# EAGLE board VCF-LM324-Stereo-Modular+LFO (EAGLE 7.7.0)
Voltage-Controlled Low-Pass Filter with LFO using LM324 Quad-Opamp (Stereo) Using CadSoft EAGLE Modular Design Sheets
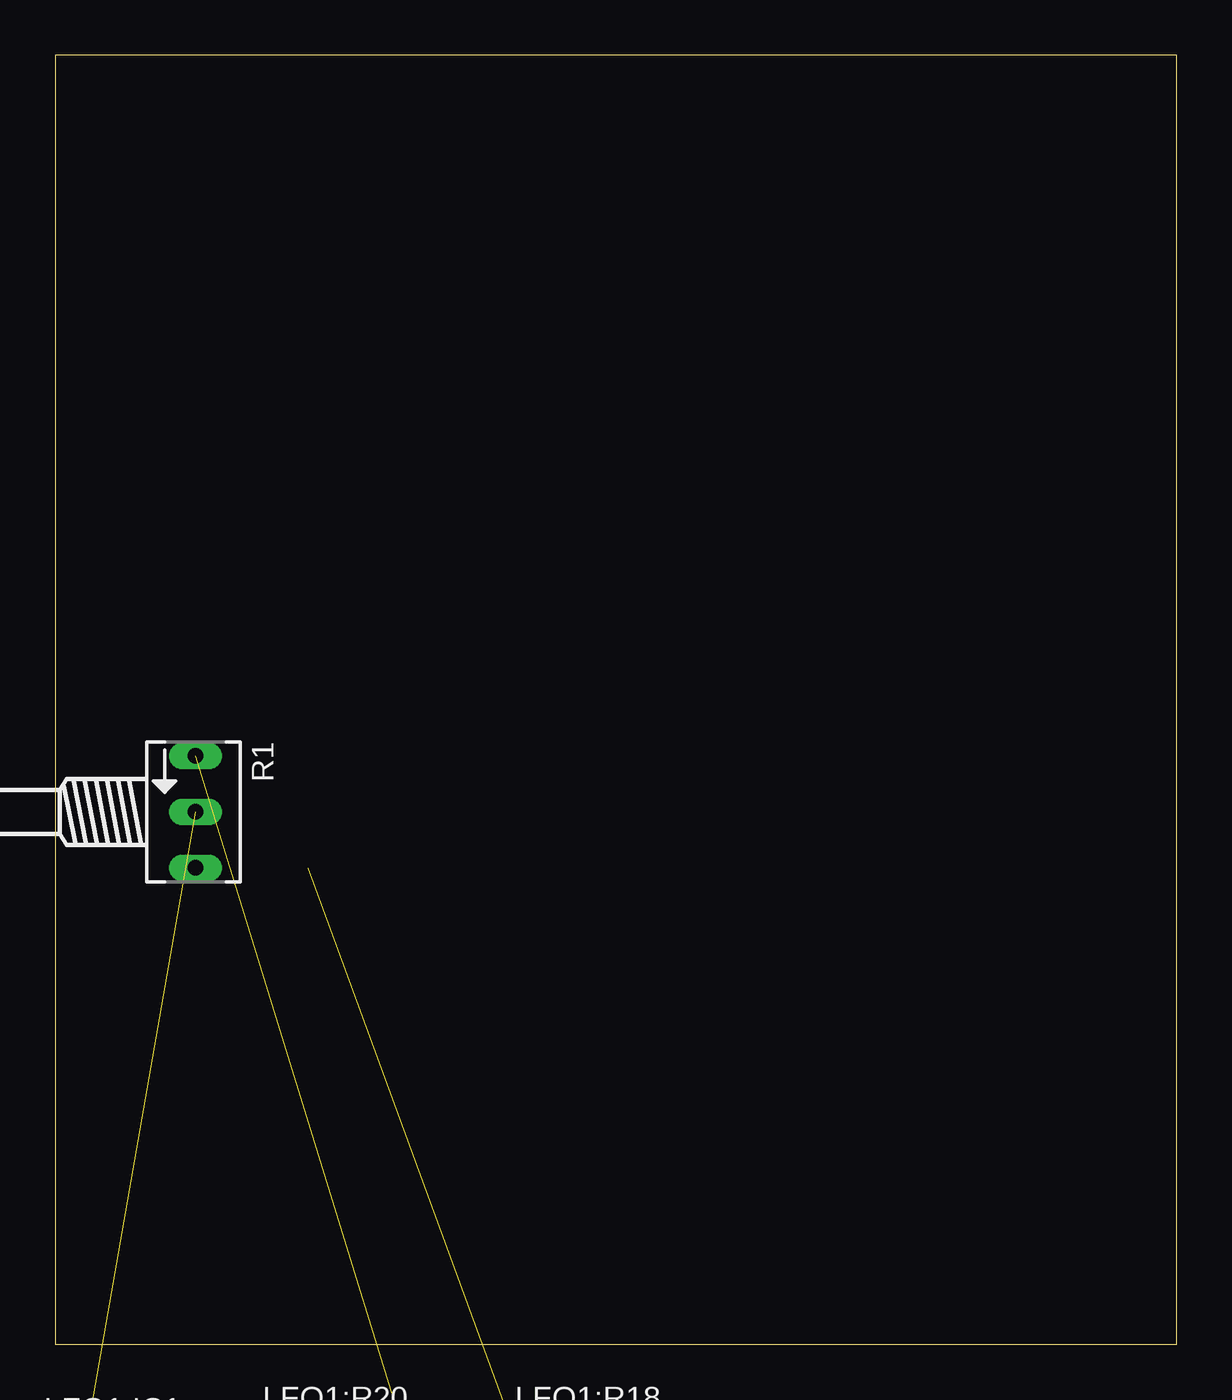
[diagram p0: board, top side]
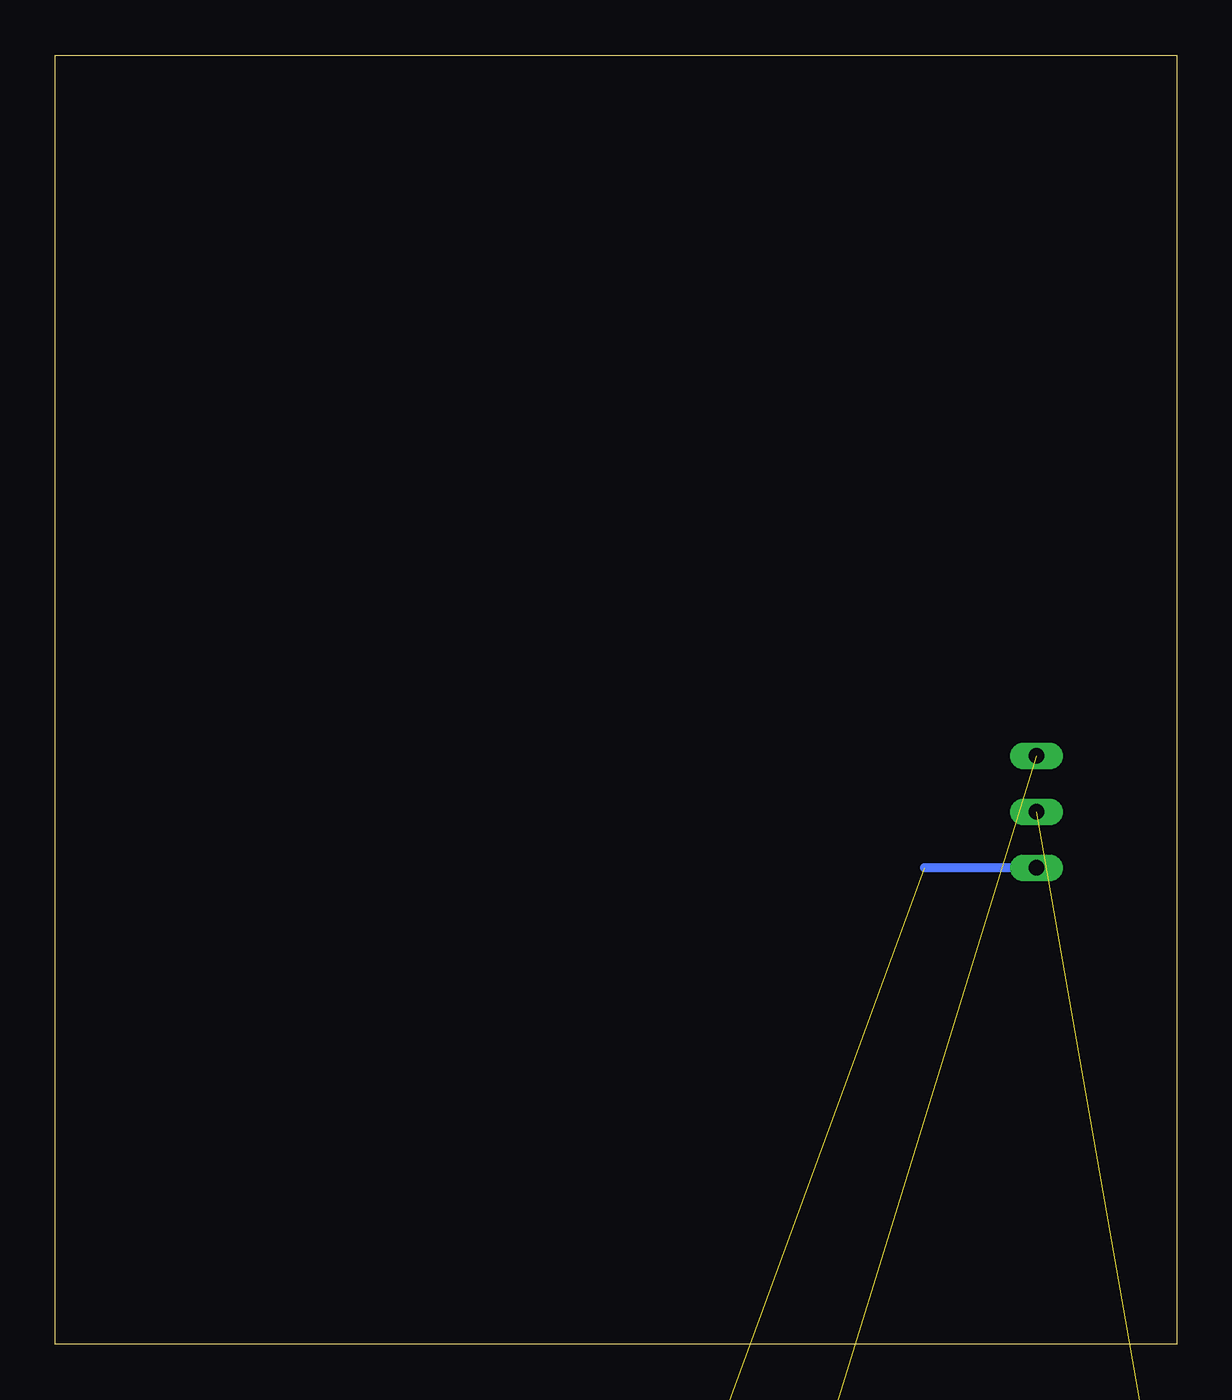
[diagram p1: board, bottom side, seen from below]

Size 50.8 x 58.42 mm. Coordinates in mm from the lower left corner, seen from the top.
Outline: 0,0 50.8,0 50.8,58.42 0,58.42 0,0
Copper layers (1*16): Top 0.035mm / dielectric 1.5mm / Bottom 0.035mm
Design rules "default": minimum track width 10mil, minimum drill 24mil, track to track 8mil, track to pad 8mil, pad to pad 8mil, via to via 8mil, smd to smd 8mil, copper to edge 40mil, drill to drill 8mil, minimum pad ring 10mil, minimum via ring 8mil, stop-mask expansion 4mil, vias tented up to drill 0mil, thermal gap 10mil

## Footprints (pad centres in the part's own frame; a part is rotated, then mirrored left to right if it is on the bottom)
C050-020X036 = drill 0.8: 1 -2.54,0; 2 2.54,0
C050-024X044/V = drill 0.8: 1 0,2.54; 2 0,-2.54
DO34-7V = drill 0.8: A 0,3.81; C 0,-3.81
DIL14 = drill 0.8 long: 1 -3.81,7.62; 2 -3.81,5.08; 3 -3.81,2.54; 4 -3.81,0; 5 -3.81,-2.54; 6 -3.81,-5.08; 7 -3.81,-7.62; 8 3.81,-7.62; 9 3.81,-5.08; 10 3.81,-2.54; 11 3.81,0; 12 3.81,2.54; 13 3.81,5.08; 14 3.81,7.62
LED3MM = drill 0.813 octagon: A -1.27,0; K 1.27,0
0202/7-V = drill 0.7: 1 0,-3.81; 2 0,3.81
0202/7 = drill 0.7: 1 0,3.81; 2 0,-3.81
POT = drill 1 pad 1.93: 1 -2.54,0; 2 0,0; 3 2.54,0
SPAD = drill 1 pad 1.93: 1 0,0
B64Y = drill 0.7 long: A 2.54,0; E -2.54,0; S 0,0
POT-STEREO = drill 1: 1-1 -2.46,-2.54; 1-2 0,-2.54; 1-3 2.46,-2.54; 2-1 -2.46,-0.08; 2-2 0,-0.08; 2-3 2.46,-0.08
C050-024X044 = drill 0.8: 1 -2.54,0; 2 2.54,0
E2,5-3 = drill 0.7 square: + 0,1.27 | drill 0.7: - 0,-1.27
DO34-10V = drill 0.8: A 0,5.08; C 0,-5.08

## Placement (x,y rotation side)
C1  100nF  [C050-020X036]  -26.67,-153.67 0 top  (outside the outline)
LFO1:C9  1uF  [C050-024X044/V]  31.75,-35.56 0 top  (outside the outline)
LFO1:D3  1N4148  [DO34-7V]  6.35,-36.83 0 top  (outside the outline)
LFO1:D4  1N4148  [DO34-7V]  13.97,-36.83 0 top  (outside the outline)
LFO1:IC1  LM324  [DIL14]  2.54,-12.7 0 top  (outside the outline)
LFO1:LED1  [LED3MM]  2.54,-44.45 0 top  (outside the outline)
LFO1:LED2  [LED3MM]  16.51,-44.45 0 top  (outside the outline)
LFO1:R16  47k  [0202/7-V]  3.81,-26.67 0 top  (outside the outline)
LFO1:R17  4.7k  [0202/7]  22.86,-36.83 0 top  (outside the outline)
LFO1:R18  10k  [POT]  25.4,-5.08 0 top  (outside the outline)
LFO1:R19  4.7k  [0202/7-V]  12.7,-26.67 0 top  (outside the outline)
LFO1:R20  100k  [POT]  13.97,-5.08 0 top  (outside the outline)
LFO1:R21  100k  [0202/7-V]  21.59,-26.67 0 top  (outside the outline)
LFO1:R22  100k  [0202/7-V]  30.48,-26.67 0 top  (outside the outline)
LFO1:R23  1k  [0202/7-V]  3.81,-36.83 0 top  (outside the outline)
LFO1:TRI_OUT  TRIANGLE  [SPAD]  -1.27,-45.72 0 top  (outside the outline)
R1  100k  [B64Y]  6.35,24.13 270 top
R2  10k  [POT-STEREO]  -40.64,-186.69 0 top  (outside the outline)
VCF_LEFT:C1  100nF  [C050-024X044]  10.16,-82.55 0 top  (outside the outline)
VCF_LEFT:C2  100nF  [C050-024X044]  -10.16,-90.17 0 top  (outside the outline)
VCF_LEFT:C3  1uF  [E2,5-3]  -10.16,-82.55 0 top  (outside the outline)
VCF_LEFT:C4  1uF  [E2,5-3]  -3.81,-82.55 0 top  (outside the outline)
VCF_LEFT:C5  100nF  [C050-024X044]  -27.94,-281.94 0 top  (outside the outline)
VCF_LEFT:C6  100nF  [C050-024X044]  -20.32,-281.94 0 top  (outside the outline)
VCF_LEFT:C7  1uF  [E2,5-3]  -22.86,-271.78 0 top  (outside the outline)
VCF_LEFT:C8  1uF  [E2,5-3]  -16.51,-271.78 0 top  (outside the outline)
VCF_LEFT:D1  1N4148  [DO34-10V]  11.43,-55.88 0 top  (outside the outline)
VCF_LEFT:D2  1N4148  [DO34-7V]  -19.05,-242.57 0 top  (outside the outline)
VCF_LEFT:IC1  LM324  [DIL14]  -7.62,-59.69 0 top  (outside the outline)
VCF_LEFT:IC2  LM324  [DIL14]  -39.37,-248.92 0 top  (outside the outline)
VCF_LEFT:R2  1k  [0202/7]  -11.43,-73.66 0 top  (outside the outline)
VCF_LEFT:R3  1k  [0202/7]  -7.62,-73.66 0 top  (outside the outline)
VCF_LEFT:R4  470k  [0202/7]  -3.81,-73.66 0 top  (outside the outline)
VCF_LEFT:R5  100k  [0202/7]  0,-73.66 0 top  (outside the outline)
VCF_LEFT:R6  100k  [0202/7]  3.81,-73.66 0 top  (outside the outline)
VCF_LEFT:R7  100k  [0202/7]  7.62,-73.66 0 top  (outside the outline)
VCF_LEFT:R9  1k  [0202/7]  -34.29,-262.89 0 top  (outside the outline)
VCF_LEFT:R10  1k  [0202/7]  -30.48,-262.89 0 top  (outside the outline)
VCF_LEFT:R11  470k  [0202/7]  -26.67,-262.89 0 top  (outside the outline)
VCF_LEFT:R12  100k  [0202/7]  -22.86,-262.89 0 top  (outside the outline)
VCF_LEFT:R13  100k  [0202/7]  -19.05,-262.89 0 top  (outside the outline)
VCF_LEFT:R14  100k  [0202/7]  -15.24,-262.89 0 top  (outside the outline)
VCF_RIGHT:C1  100nF  [C050-024X044]  -34.29,-233.68 0 top  (outside the outline)
VCF_RIGHT:C2  100nF  [C050-024X044]  -26.67,-233.68 0 top  (outside the outline)
VCF_RIGHT:C3  1uF  [E2,5-3]  -22.86,-223.52 0 top  (outside the outline)
VCF_RIGHT:C4  1uF  [E2,5-3]  -41.91,-233.68 0 top  (outside the outline)
VCF_RIGHT:C5  100nF  [C050-024X044]  -12.7,-281.94 0 top  (outside the outline)
VCF_RIGHT:C6  100nF  [C050-024X044]  -41.91,-288.29 0 top  (outside the outline)
VCF_RIGHT:C7  1uF  [E2,5-3]  -41.91,-281.94 0 top  (outside the outline)
VCF_RIGHT:C8  1uF  [E2,5-3]  -35.56,-281.94 0 top  (outside the outline)
VCF_RIGHT:D1  1N4148  [DO34-10V]  -31.75,-205.74 0 top  (outside the outline)
VCF_RIGHT:D2  1N4148  [DO34-7V]  -44.45,-262.89 0 top  (outside the outline)
VCF_RIGHT:IC1  LM324  [DIL14]  -39.37,-210.82 0 top  (outside the outline)
VCF_RIGHT:IC2  LM324  [DIL14]  -26.67,-248.92 0 top  (outside the outline)
VCF_RIGHT:R2  1k  [0202/7]  -21.59,-204.47 0 top  (outside the outline)
VCF_RIGHT:R3  1k  [0202/7]  -43.18,-224.79 0 top  (outside the outline)
VCF_RIGHT:R4  470k  [0202/7]  -39.37,-224.79 0 top  (outside the outline)
VCF_RIGHT:R5  100k  [0202/7]  -35.56,-224.79 0 top  (outside the outline)
VCF_RIGHT:R6  100k  [0202/7]  -31.75,-224.79 0 top  (outside the outline)
VCF_RIGHT:R7  100k  [0202/7]  -27.94,-224.79 0 top  (outside the outline)
VCF_RIGHT:R9  1k  [0202/7]  -11.43,-262.89 0 top  (outside the outline)
VCF_RIGHT:R10  1k  [0202/7]  -43.18,-273.05 0 top  (outside the outline)
VCF_RIGHT:R11  470k  [0202/7]  -39.37,-273.05 0 top  (outside the outline)
VCF_RIGHT:R12  100k  [0202/7]  -35.56,-273.05 0 top  (outside the outline)
VCF_RIGHT:R13  100k  [0202/7]  -31.75,-273.05 0 top  (outside the outline)
VCF_RIGHT:R14  100k  [0202/7]  -27.94,-273.05 0 top  (outside the outline)

## Library data of the parts
C1 LFO1:C9 VCF_LEFT:C1-VCF_LEFT:C8 VCF_RIGHT:C1-VCF_RIGHT:C8 = c
LFO1:D3 LFO1:D4 VCF_LEFT:D1 VCF_LEFT:D2 VCF_RIGHT:D1 VCF_RIGHT:D2 = d
LFO1:IC1 VCF_LEFT:IC1 VCF_LEFT:IC2 VCF_RIGHT:IC1 VCF_RIGHT:IC2 = ic
LFO1:LED1 LFO1:LED2 = led
LFO1:R16-LFO1:R23 R1 R2 VCF_LEFT:R2-VCF_LEFT:R7 VCF_LEFT:R9-VCF_LEFT:R14 VCF_RIGHT:R2-VCF_RIGHT:R7 VCF_RIGHT:R9-VCF_RIGHT:R14 = r
LFO1:TRI_OUT = pad

## Nets
CV_POT: R1.S VCF_LEFT:R2.2 VCF_RIGHT:R2.2
GND: C1.2 LFO1:R22.1 R1.A VCF_LEFT:D1.C VCF_LEFT:D2.C VCF_LEFT:IC1.11 VCF_LEFT:R6.1 VCF_LEFT:R13.1 VCF_RIGHT:D1.C VCF_RIGHT:D2.C VCF_RIGHT:IC1.11 VCF_RIGHT:R6.1 VCF_RIGHT:R13.1
LFO1:N$14: LFO1:IC1.7 LFO1:R16.2 LFO1:R19.1
LFO1:N$15: LFO1:IC1.5 LFO1:LED1.A LFO1:LED2.K LFO1:R16.1
LFO1:N$26: LFO1:C9.1 LFO1:D3.C LFO1:D4.A LFO1:IC1.9
LFO1:N$28: LFO1:C9.2 LFO1:IC1.8 LFO1:LED1.K LFO1:LED2.A LFO1:R23.2
LFO1:OA_C_IN+: LFO1:IC1.6 LFO1:IC1.10 LFO1:R21.1 LFO1:R22.2
LFO1:TRIM_1_A: LFO1:D3.A LFO1:R20.1
LFO1:TRIM_1_B: LFO1:D4.C LFO1:R20.3
LFO1:TRIM_2_A: LFO1:R17.1 LFO1:R18.3
LFO1:TRIM_2_B: LFO1:R18.1 LFO1:R19.2
LFO1:TRIM_P: LFO1:R17.2 LFO1:R18.2 LFO1:R20.2
LFO1:V+: LFO1:IC1.4
LFO1:V-: LFO1:IC1.11
N$1: R2.1-2 R2.1-3 VCF_LEFT:C3.+ VCF_LEFT:IC1.1 VCF_LEFT:R7.2
N$2: R2.1-1 VCF_LEFT:C2.2
N$3: R2.2-2 R2.2-3 VCF_RIGHT:C3.+ VCF_RIGHT:IC1.1 VCF_RIGHT:R7.2
N$4: R2.2-1 VCF_RIGHT:C2.2
N$5: LFO1:R23.1 LFO1:TRI_OUT.1 VCF_LEFT:R3.2 VCF_RIGHT:R3.2
VCC: C1.1 LFO1:R21.2 R1.E VCF_LEFT:IC1.4 VCF_LEFT:R5.1 VCF_LEFT:R12.1 VCF_RIGHT:IC1.4 VCF_RIGHT:R5.1 VCF_RIGHT:R12.1
VCF_LEFT:CV_IN1: VCF_LEFT:R10.2
VCF_LEFT:CV_POT1: VCF_LEFT:R9.2
VCF_LEFT:L_IN: VCF_LEFT:C4.+
VCF_LEFT:L_OUT: VCF_LEFT:C3.-
VCF_LEFT:N$2: VCF_LEFT:C1.1 VCF_LEFT:IC1.2 VCF_LEFT:R4.2 VCF_LEFT:R7.1
VCF_LEFT:N$7: VCF_LEFT:IC1.3 VCF_LEFT:R5.2 VCF_LEFT:R6.2
VCF_LEFT:N$9: VCF_LEFT:C1.2 VCF_LEFT:C2.1 VCF_LEFT:D1.A VCF_LEFT:R2.1 VCF_LEFT:R3.1
VCF_LEFT:N$10: VCF_LEFT:C4.- VCF_LEFT:R4.1
VCF_LEFT:N$13: VCF_LEFT:IC2.13 VCF_LEFT:R12.2 VCF_LEFT:R13.2
VCF_LEFT:N$16: VCF_LEFT:C5.2 VCF_LEFT:C6.1 VCF_LEFT:D2.A VCF_LEFT:R9.1 VCF_LEFT:R10.1
VCF_LEFT:N$17: VCF_LEFT:C5.1 VCF_LEFT:IC2.12 VCF_LEFT:R11.2 VCF_LEFT:R14.1
VCF_LEFT:N$20: VCF_LEFT:C8.- VCF_LEFT:R11.1
VCF_LEFT:R_IN: VCF_LEFT:C8.+
VCF_LEFT:R_OUT: VCF_LEFT:C7.-
VCF_LEFT:R_P_R_IN: VCF_LEFT:C7.+ VCF_LEFT:IC2.14 VCF_LEFT:R14.2
VCF_LEFT:R_P_R_OUT: VCF_LEFT:C6.2
VCF_LEFT:V+: VCF_LEFT:IC2.4
VCF_LEFT:V-: VCF_LEFT:IC2.11
VCF_RIGHT:CV_IN1: VCF_RIGHT:R10.2
VCF_RIGHT:CV_POT1: VCF_RIGHT:R9.2
VCF_RIGHT:L_IN: VCF_RIGHT:C4.+
VCF_RIGHT:L_OUT: VCF_RIGHT:C3.-
VCF_RIGHT:N$2: VCF_RIGHT:C1.1 VCF_RIGHT:IC1.2 VCF_RIGHT:R4.2 VCF_RIGHT:R7.1
VCF_RIGHT:N$7: VCF_RIGHT:IC1.3 VCF_RIGHT:R5.2 VCF_RIGHT:R6.2
VCF_RIGHT:N$9: VCF_RIGHT:C1.2 VCF_RIGHT:C2.1 VCF_RIGHT:D1.A VCF_RIGHT:R2.1 VCF_RIGHT:R3.1
VCF_RIGHT:N$10: VCF_RIGHT:C4.- VCF_RIGHT:R4.1
VCF_RIGHT:N$13: VCF_RIGHT:IC2.13 VCF_RIGHT:R12.2 VCF_RIGHT:R13.2
VCF_RIGHT:N$16: VCF_RIGHT:C5.2 VCF_RIGHT:C6.1 VCF_RIGHT:D2.A VCF_RIGHT:R9.1 VCF_RIGHT:R10.1
VCF_RIGHT:N$17: VCF_RIGHT:C5.1 VCF_RIGHT:IC2.12 VCF_RIGHT:R11.2 VCF_RIGHT:R14.1
VCF_RIGHT:N$20: VCF_RIGHT:C8.- VCF_RIGHT:R11.1
VCF_RIGHT:R_IN: VCF_RIGHT:C8.+
VCF_RIGHT:R_OUT: VCF_RIGHT:C7.-
VCF_RIGHT:R_P_R_IN: VCF_RIGHT:C7.+ VCF_RIGHT:IC2.14 VCF_RIGHT:R14.2
VCF_RIGHT:R_P_R_OUT: VCF_RIGHT:C6.2
VCF_RIGHT:V+: VCF_RIGHT:IC2.4
VCF_RIGHT:V-: VCF_RIGHT:IC2.11

## Tracks (layer width: path | path; a pad name or v marks a point on that pad's centre or on a via)
CV_POT  (2 unrouted)
GND  (12 unrouted)
  Bottom 0.406: R1.A 11.43,21.59
LFO1:N$14  (2 unrouted)
LFO1:N$15  (3 unrouted)
LFO1:N$26  (3 unrouted)
LFO1:N$28  (4 unrouted)
LFO1:OA_C_IN+  (3 unrouted)
LFO1:TRIM_1_A  (1 unrouted)
LFO1:TRIM_1_B  (1 unrouted)
LFO1:TRIM_2_A  (1 unrouted)
LFO1:TRIM_2_B  (1 unrouted)
LFO1:TRIM_P  (2 unrouted)
N$1  (4 unrouted)
N$2  (1 unrouted)
N$3  (4 unrouted)
N$4  (1 unrouted)
N$5  (3 unrouted)
VCC  (8 unrouted)
VCF_LEFT:N$2  (3 unrouted)
VCF_LEFT:N$7  (2 unrouted)
VCF_LEFT:N$9  (4 unrouted)
VCF_LEFT:N$10  (1 unrouted)
VCF_LEFT:N$13  (2 unrouted)
VCF_LEFT:N$16  (4 unrouted)
VCF_LEFT:N$17  (3 unrouted)
VCF_LEFT:N$20  (1 unrouted)
VCF_LEFT:R_P_R_IN  (2 unrouted)
VCF_RIGHT:N$2  (3 unrouted)
VCF_RIGHT:N$7  (2 unrouted)
VCF_RIGHT:N$9  (4 unrouted)
VCF_RIGHT:N$10  (1 unrouted)
VCF_RIGHT:N$13  (2 unrouted)
VCF_RIGHT:N$16  (4 unrouted)
VCF_RIGHT:N$17  (3 unrouted)
VCF_RIGHT:N$20  (1 unrouted)
VCF_RIGHT:R_P_R_IN  (2 unrouted)